# EAGLE board ram-2mb (EAGLE 9.5.2), part 1 of 2
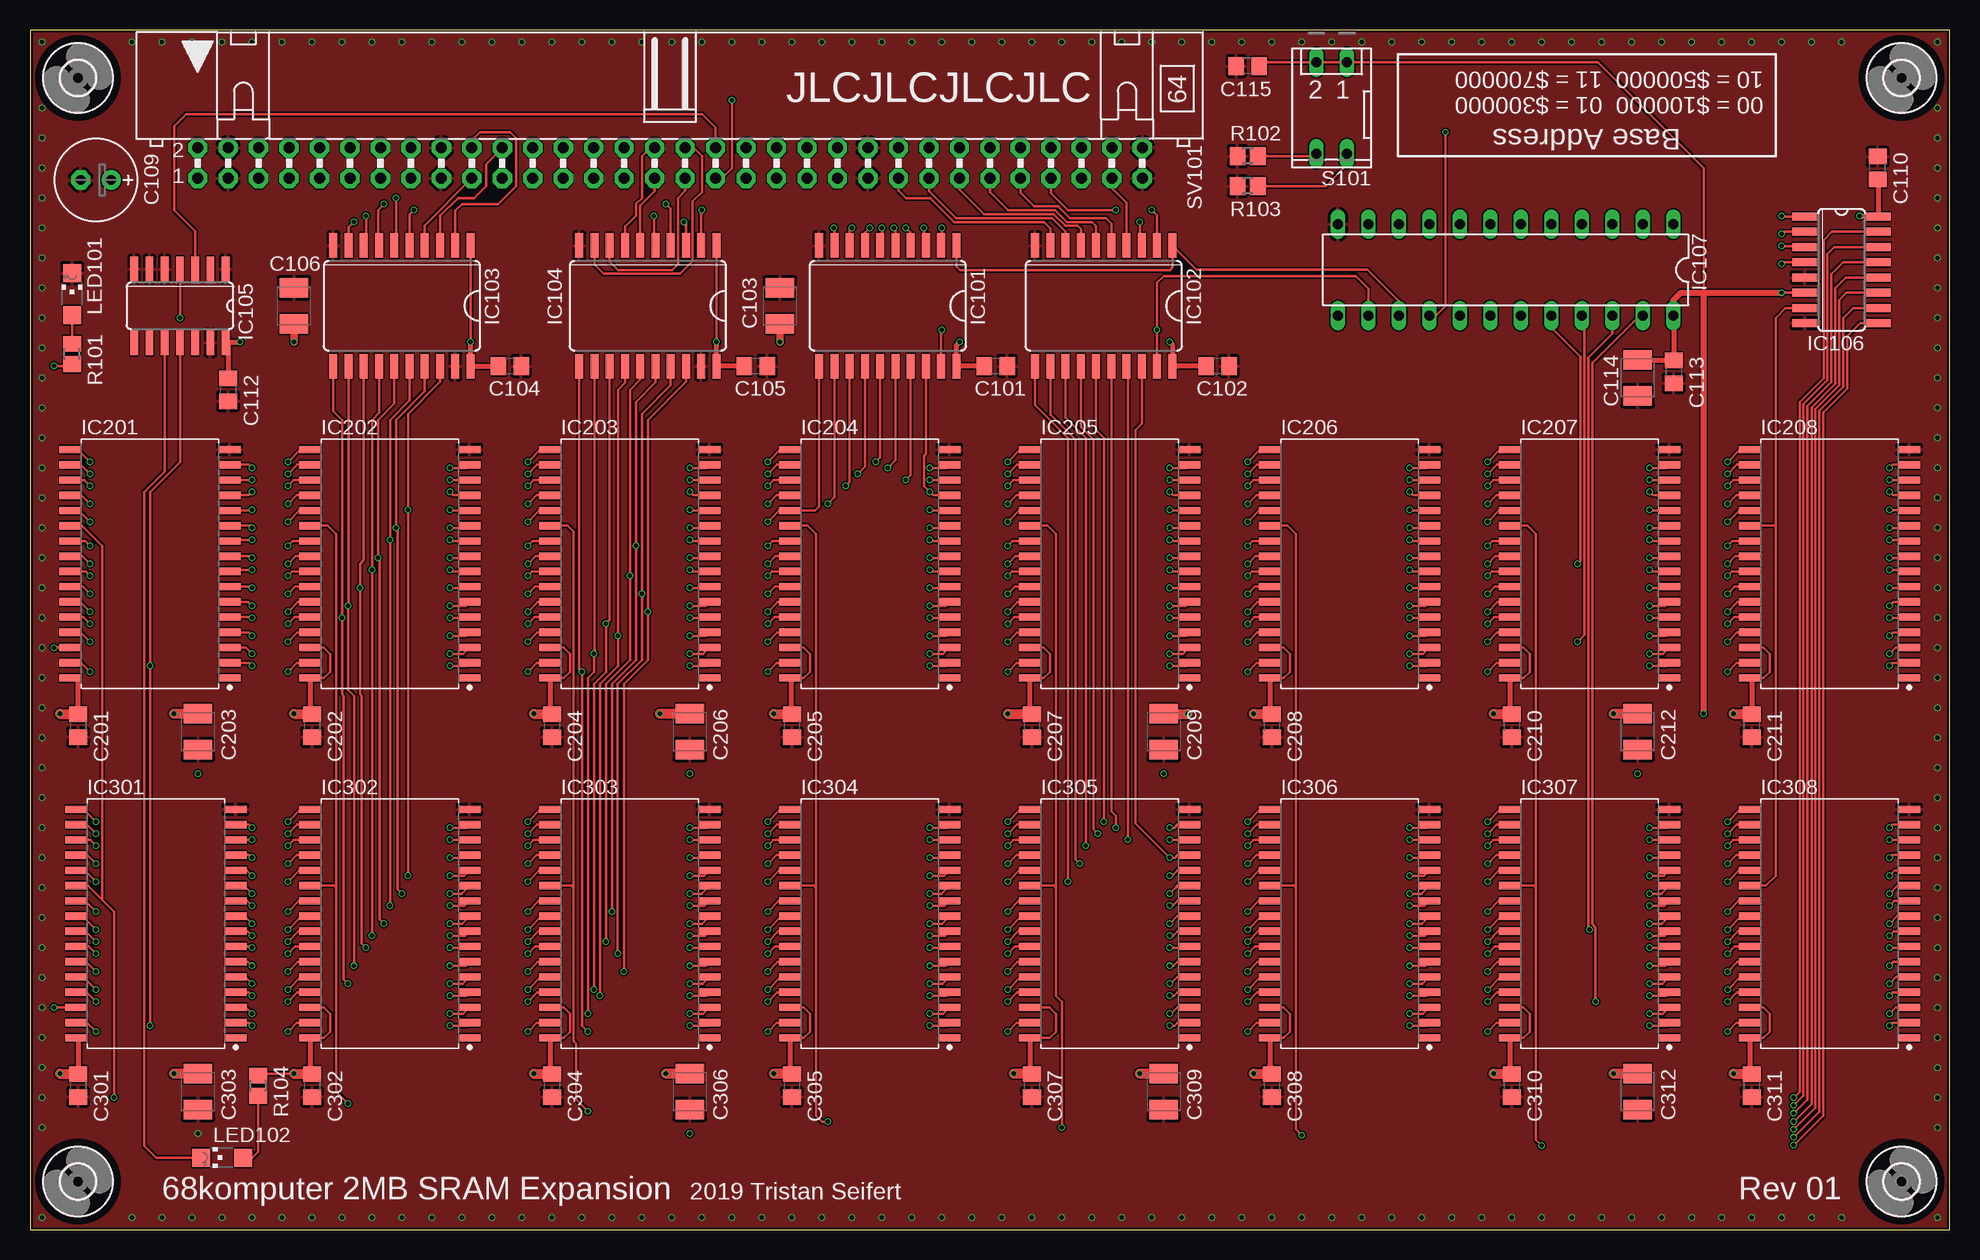
[diagram p0: board, top side]
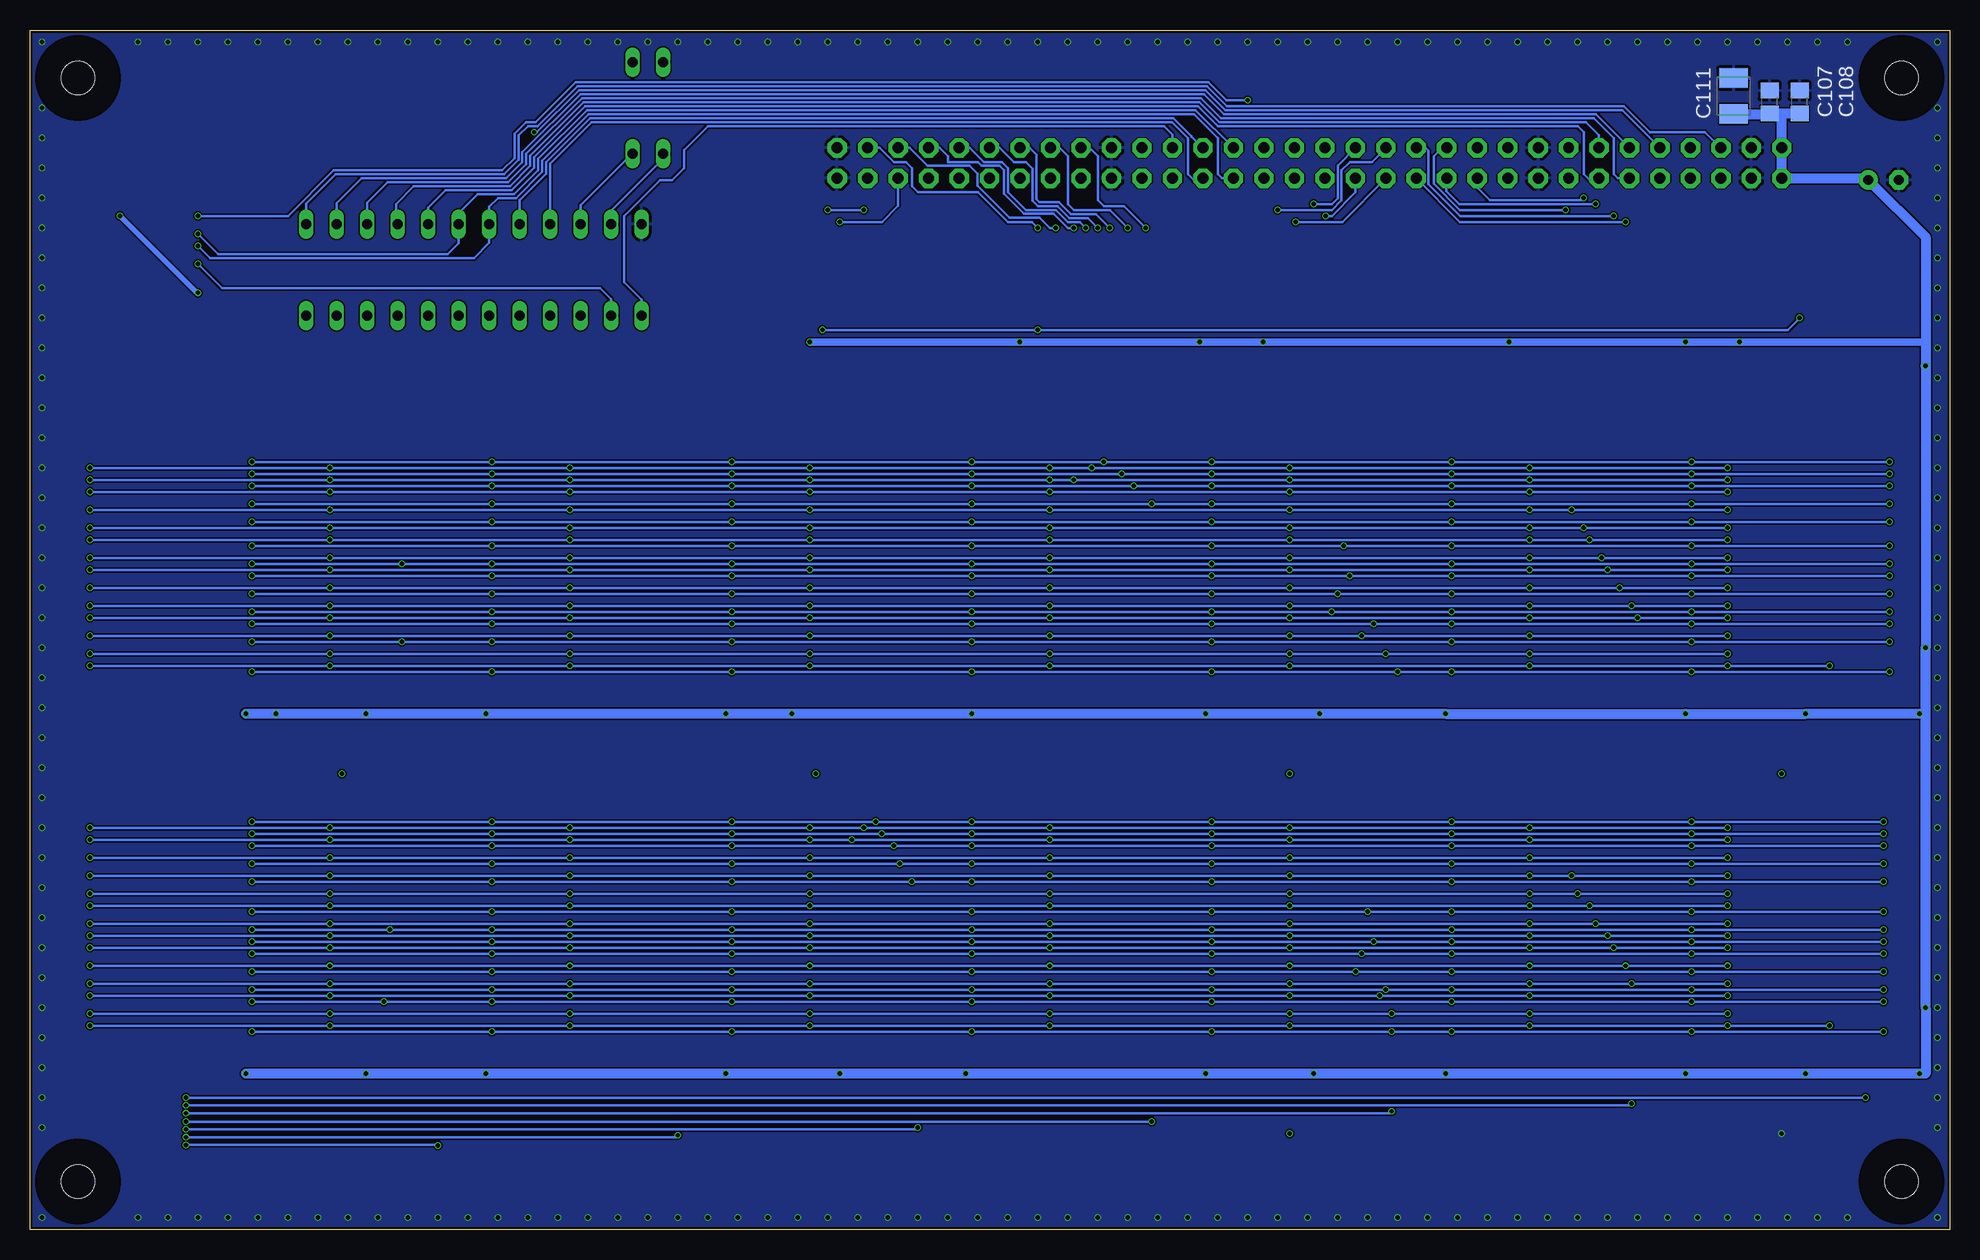
[diagram p1: board, bottom side, seen from below]

Size 160 x 100 mm. Coordinates in mm from the lower left corner, seen from the top.
Outline: 0,0 160,0 160,100 0,100 0,0
Copper layers (1*16): Top 0.035559375mm / dielectric 1.6mm / Bottom 0.035559375mm
Design rules "jlcpcb2layer": minimum track width 5mil, minimum drill 12mil, track to track 5mil, track to pad 5mil, pad to pad 5mil, via to via 5mil, smd to smd 5mil, copper to edge 8mil, drill to drill 6mil, minimum pad ring 5mil, minimum via ring 3mil, stop-mask expansion 2.5mil, vias tented up to drill 0mil, thermal gap 10mil
Net classes: 0 default: width 0.203 mm

## Footprints (pad centres in the part's own frame; a part is rotated, then mirrored left to right if it is on the bottom)
C0805 = smd 1.3 x 1.5: 1 -0.95,0; 2 0.95,0
SMC_B = smd 1.6 x 2.4: + -1.5,0; - 1.5,0
E2,5-7 = drill 0.813 pad 1.6: + -1.27,0 | drill 0.813 pad 1.6 octagon: - 1.27,0
2,8 = hole 2.8: 0,0
SO20W = smd 0.66 x 2.032: 1 -5.715,-5.029; 2 -4.445,-5.029; 3 -3.175,-5.029; 4 -1.905,-5.029; 5 -0.635,-5.029; 6 0.635,-5.029; 7 1.905,-5.029; 8 3.175,-5.029; 9 4.445,-5.029; 10 5.715,-5.029; 11 5.715,5.029; 12 4.445,5.029; 13 3.175,5.029; 14 1.905,5.029; 15 0.635,5.029; 16 -0.635,5.029; 17 -1.905,5.029; 18 -3.175,5.029; 19 -4.445,5.029; 20 -5.715,5.029
SO14 = smd 0.66 x 2.032: 1 -3.81,-3.073; 2 -2.54,-3.073; 3 -1.27,-3.073; 4 0,-3.073; 5 1.27,-3.073; 6 2.54,-3.073; 7 3.81,-3.073; 8 3.81,3.073; 9 2.54,3.073; 10 1.27,3.073; 11 0,3.073; 12 -1.27,3.073; 13 -2.54,3.073; 14 -3.81,3.073
SO16 = smd 0.66 x 2.032: 1 -4.445,-3.073; 2 -3.175,-3.073; 3 -1.905,-3.073; 4 -0.635,-3.073; 5 0.635,-3.073; 6 1.905,-3.073; 7 3.175,-3.073; 8 4.445,-3.073; 9 4.445,3.073; 10 3.175,3.073; 11 1.905,3.073; 12 0.635,3.073; 13 -0.635,3.073; 14 -1.905,3.073; 15 -3.175,3.073; 16 -4.445,3.073
DIL24S = drill 0.813 long: 1 -13.97,-3.81; 2 -11.43,-3.81; 3 -8.89,-3.81; 4 -6.35,-3.81; 5 -3.81,-3.81; 6 -1.27,-3.81; 7 1.27,-3.81; 8 3.81,-3.81; 9 6.35,-3.81; 10 8.89,-3.81; 11 11.43,-3.81; 12 13.97,-3.81; 13 13.97,3.81; 14 11.43,3.81; 15 8.89,3.81; 16 6.35,3.81; 17 3.81,3.81; 18 1.27,3.81; 19 -1.27,3.81; 20 -3.81,3.81; 21 -6.35,3.81; 22 -8.89,3.81; 23 -11.43,3.81; 24 -13.97,3.81
SOIC127P1412X299-32N = smd 1.816 x 0.605: 1 -6.636,9.525; 2 -6.636,8.255; 3 -6.636,6.985; 4 -6.636,5.715; 5 -6.636,4.445; 6 -6.636,3.175; 7 -6.636,1.905; 8 -6.636,0.635; 9 -6.636,-0.635; 10 -6.636,-1.905; 11 -6.636,-3.175; 12 -6.636,-4.445; 13 -6.636,-5.715; 14 -6.636,-6.985; 15 -6.636,-8.255; 16 -6.636,-9.525; 17 6.636,-9.525; 18 6.636,-8.255; 19 6.636,-6.985; 20 6.636,-5.715; 21 6.636,-4.445; 22 6.636,-3.175; 23 6.636,-1.905; 24 6.636,-0.635; 25 6.636,0.635; 26 6.636,1.905; 27 6.636,3.175; 28 6.636,4.445; 29 6.636,5.715; 30 6.636,6.985; 31 6.636,8.255; 32 6.636,9.525
CHIPLED_1206 = smd 1.5 x 1.5: A 0,-1.75; C 0,1.75
R2012 = smd 1.3 x 1.5: 1 -0.85,0; 2 0.85,0
DP-02 = drill 0.813 long: 1 -1.27,-3.81; 2 1.27,-3.81; 3 1.27,3.81; 4 -1.27,3.81
ML64L = drill 0.914 pad 1.6 octagon: 1 -39.37,-1.27; 2 -39.37,1.27; 3 -36.83,-1.27; 4 -36.83,1.27; 5 -34.29,-1.27; 6 -34.29,1.27; 7 -31.75,-1.27; 8 -31.75,1.27; 9 -29.21,-1.27; 10 -29.21,1.27; 11 -26.67,-1.27; 12 -26.67,1.27; 13 -24.13,-1.27; 14 -24.13,1.27; 15 -21.59,-1.27; 16 -21.59,1.27; 17 -19.05,-1.27; 18 -19.05,1.27; 19 -16.51,-1.27; 20 -16.51,1.27; 21 -13.97,-1.27; 22 -13.97,1.27; 23 -11.43,-1.27; 24 -11.43,1.27; 25 -8.89,-1.27; 26 -8.89,1.27; 27 -6.35,-1.27; 28 -6.35,1.27; 29 -3.81,-1.27; 30 -3.81,1.27; 31 -1.27,-1.27; 32 -1.27,1.27; 33 1.27,-1.27; 34 1.27,1.27; 35 3.81,-1.27; 36 3.81,1.27; 37 6.35,-1.27; 38 6.35,1.27; 39 8.89,-1.27; 40 8.89,1.27; 41 11.43,-1.27; 42 11.43,1.27; 43 13.97,-1.27; 44 13.97,1.27; 45 16.51,-1.27; 46 16.51,1.27; 47 19.05,-1.27; 48 19.05,1.27; 49 21.59,-1.27; 50 21.59,1.27; 51 24.13,-1.27; 52 24.13,1.27; 53 26.67,-1.27; 54 26.67,1.27; 55 29.21,-1.27; 56 29.21,1.27; 57 31.75,-1.27; 58 31.75,1.27; 59 34.29,-1.27; 60 34.29,1.27; 61 36.83,-1.27; 62 36.83,1.27; 63 39.37,-1.27; 64 39.37,1.27

## Placement (x,y rotation side)
C101  100nF  [C0805]  80.5,72 0 top
C102  100nF  [C0805]  99,72 0 top
C103  10µF  [SMC_B]  62.5,77 90 top
C104  100nF  [C0805]  40,72 0 top
C105  100nF  [C0805]  60.5,72 0 top
C106  10µF  [SMC_B]  22,77 90 top
C107  100nF  [C0805]  15,94 90 bottom
C108  1µF  [C0805]  12.5,94 90 bottom
C109  120µF  [E2,5-7]  5.5,87.5 180 top
C110  100nF  [C0805]  154,88.5 90 top
C111  10µF  [SMC_B]  18,94.5 90 bottom
C112  100nF  [C0805]  16.5,70 270 top
C113  100nF  [C0805]  137,71.5 270 top
C114  10µF  [SMC_B]  134,71 270 top
C115  100nF  [C0805]  101.5,97 180 top
C201  100nF  [C0805]  4,42 270 top
C202  100nF  [C0805]  23.5,42 270 top
C203  10µF  [SMC_B]  14,41.5 270 top
C204  100nF  [C0805]  43.5,42 270 top
C205  100nF  [C0805]  63.5,42 270 top
C206  10µF  [SMC_B]  55,41.5 270 top
C207  100nF  [C0805]  83.5,42 270 top
C208  100nF  [C0805]  103.5,42 270 top
C209  10µF  [SMC_B]  94.5,41.5 270 top
C210  100nF  [C0805]  123.5,42 270 top
C211  100nF  [C0805]  143.5,42 270 top
C212  10µF  [SMC_B]  134,41.5 270 top
C301  100nF  [C0805]  4,12 270 top
C302  100nF  [C0805]  23.5,12 270 top
C303  10µF  [SMC_B]  14,11.5 270 top
C304  100nF  [C0805]  43.5,12 270 top
C305  100nF  [C0805]  63.5,12 270 top
C306  10µF  [SMC_B]  55,11.5 270 top
C307  100nF  [C0805]  83.5,12 270 top
C308  100nF  [C0805]  103.5,12 270 top
C309  10µF  [SMC_B]  94.5,11.5 270 top
C310  100nF  [C0805]  123.5,12 270 top
C311  100nF  [C0805]  143.5,12 270 top
C312  10µF  [SMC_B]  134,11.5 270 top
H101  MOUNT-HOLE2.8  [2,8]  4,96 0 top
H102  MOUNT-HOLE2.8  [2,8]  4,4 0 top
H103  MOUNT-HOLE2.8  [2,8]  156,96 0 top
H104  MOUNT-HOLE2.8  [2,8]  156,4 0 top
IC101  74HC245DW  [SO20W]  71.5,77 180 top
IC102  74HC245DW  [SO20W]  89.5,77 180 top
IC103  74HC245DW  [SO20W]  31,77 180 top
IC104  74HC245DW  [SO20W]  51.5,77 180 top
IC105  74HC243D  [SO14]  12.5,77 180 top
IC106  74HC138D  [SO16]  151,80 270 top
IC107  GAL22V10D  [DIL24S]  123,80 180 top
IC201  [SOIC127P1412X299-32N]  10,55.5 180 top
IC202  [SOIC127P1412X299-32N]  30,55.5 180 top
IC203  [SOIC127P1412X299-32N]  50,55.5 180 top
IC204  [SOIC127P1412X299-32N]  70,55.5 180 top
IC205  [SOIC127P1412X299-32N]  90,55.5 180 top
IC206  [SOIC127P1412X299-32N]  110,55.5 180 top
IC207  [SOIC127P1412X299-32N]  130,55.5 180 top
IC208  [SOIC127P1412X299-32N]  150,55.5 180 top
IC301  [SOIC127P1412X299-32N]  10.5,25.5 180 top
IC302  [SOIC127P1412X299-32N]  30,25.5 180 top
IC303  [SOIC127P1412X299-32N]  50,25.5 180 top
IC304  [SOIC127P1412X299-32N]  70,25.5 180 top
IC305  [SOIC127P1412X299-32N]  90,25.5 180 top
IC306  [SOIC127P1412X299-32N]  110,25.5 180 top
IC307  [SOIC127P1412X299-32N]  130,25.5 180 top
IC308  [SOIC127P1412X299-32N]  150,25.5 180 top
LED101  [CHIPLED_1206]  3.5,78 0 top
LED102  [CHIPLED_1206]  16,6 90 top
R101  3k  [R2012]  3.5,73 90 top
R102  10k  [R2012]  101.5,89.5 180 top
R103  10k  [R2012]  101.5,87 180 top
R104  3k  [R2012]  19,12 270 top
S101  [DP-02]  108.5,93.5 180 top
SV101  [ML64L]  53.34,88.9 0 top

## Library data of the parts
C101 C102 C104 C105 C107 C110 C112 C113 C115 C201 C202 C204 C205 C207 C208 C210 C211 C301 C302 C304 C305 C307 C308 C310 C311 = rcl; MOUSER: 710-885012207072; SPICEPREFIX: C
C103 C106 C111 C114 C203 C206 C209 C212 C303 C306 C309 C312 = rcl; MOUSER: 581-TAJB106K020RNJV; SPICEPREFIX: C
C108 = rcl; MOUSER: 710-885012207078; SPICEPREFIX: C
C109 = rcl; MOUSER: 710-860020373007; SPICEPREFIX: C
H101-H104 = holes
IC101-IC104 = 74xx-eu; MOUSER: 595-SN74HC245DWR
IC105 = 74xx-eu; MOUSER: 595-CD74HC243M96
IC106 = 74xx-eu; MOUSER: 595-SN74HC138DG4
IC107 = 68komputer; MOUSER_SOCKET: 575-1104732441001000
IC201-IC208 IC301-IC308 = 68komputer
LED101 = led; MOUSER: 710-156120YS75300
LED102 = led; MOUSER: 710-156120VS75300
R101 R104 = rcl; MOUSER: 652-CR0805JW-302ELF; SPICEPREFIX: R
R102 R103 = rcl; MOUSER: 652-CR0805FX-1002ELF; SPICEPREFIX: R
S101 = switch-dil; MPN: MCDP02; OC_FARNELL: 1255233; OC_NEWARK: 26M1095
SV101 = con-harting-ml; OC_FARNELL: unknown; OC_NEWARK: unknown

## Nets
!AS: IC107.5 SV101.13
!BG: SV101.9
!BGACK: SV101.8
!BR: SV101.7
!CS: IC101.19 IC102.19 IC105.4 IC106.4 IC107.14
!CS_LED: IC105.10 LED102.C
!DTACK: IC107.16 SV101.10
!EXT_ID: SV101.41
!EXTI_A: SV101.16
!EXTI_B: SV101.15
!HALT: SV101.5
!LDS: IC107.3 SV101.11
!LOE: IC107.20 IC201.24 IC202.24 IC203.24 IC204.24 IC205.24 IC206.24 IC207.24 IC208.24
!LWE: IC107.21 IC201.29 IC202.29 IC203.29 IC204.29 IC205.29 IC206.29 IC207.29 IC208.29
!RAM_CS0: IC106.15 IC201.22 IC301.22
!RAM_CS1: IC106.14 IC202.22 IC302.22
!RAM_CS2: IC106.13 IC203.22 IC303.22
!RAM_CS3: IC106.12 IC204.22 IC304.22
!RAM_CS4: IC106.11 IC205.22 IC305.22
!RAM_CS5: IC106.10 IC206.22 IC306.22
!RAM_CS6: IC106.9 IC207.22 IC307.22
!RAM_CS7: IC106.7 IC208.22 IC308.22
!RD: IC101.1 IC102.1 IC107.15
!RESET: IC107.1 SV101.6
!UDS: IC107.4 SV101.14
!UOE: IC107.22 IC301.24 IC302.24 IC303.24 IC304.24 IC305.24 IC306.24 IC307.24 IC308.24
!UWE: IC107.23 IC301.29 IC302.29 IC303.29 IC304.29 IC305.29 IC306.29 IC307.29 IC308.29
+5V: C101.1 C102.1 C103.+ C104.1 C105.1 C106.+ C107.1 C108.1 C109.+ C110.1 C111.+ C112.1 C113.1 C114.+ C115.1 C201.1 C202.1 C203.+ C204.1 C205.1 C206.+ C207.1 C208.1 C209.+ C210.1 C211.1 C212.+ C301.1 C302.1 C303.+ C304.1 C305.1 C306.+ C307.1 C308.1 C309.+ C310.1 C311.1 C312.+ IC101.20 IC102.20 IC103.1 IC103.20 IC104.1 IC104.20 IC105.14 IC106.6 IC106.16 IC107.24 IC201.30 IC201.32 IC202.30 IC202.32 IC203.30 IC203.32 IC204.30 IC204.32 IC205.30 IC205.32 IC206.30 IC206.32 IC207.30 IC207.32 IC208.30 IC208.32 IC301.30 IC301.32 IC302.30 IC302.32 IC303.30 IC303.32 IC304.30 IC304.32 IC305.30 IC305.32 IC306.30 IC306.32 IC307.30 IC307.32 IC308.30 IC308.32 R101.1 R104.1 S101.1 S101.2 SV101.1 SV101.2
A1: IC103.2 SV101.20
A2: IC103.3 SV101.22
A3: IC103.4 SV101.19
A4: IC103.5 SV101.24
A5: IC103.6 SV101.21
A6: IC103.7 SV101.23
A7: IC103.8 SV101.26
A8: IC103.9 SV101.25
A9: IC104.2 SV101.28
A10: IC104.3 SV101.27
A11: IC104.4 SV101.30
A12: IC104.5 SV101.29
A13: IC104.6 SV101.31
A14: IC104.7 SV101.32
A15: IC104.8 SV101.33
A16: IC104.9 SV101.34
A17: IC105.3 SV101.36
A18: IC106.1 SV101.35
A19: IC106.2 IC107.6 SV101.38
A20: IC106.3 IC107.7 SV101.37
A21: IC107.8 SV101.40
A22: IC107.9 SV101.39
A23: IC107.13 SV101.42
ADDR_SET0: IC107.10 R103.1 S101.4
ADDR_SET1: IC107.11 R102.1 S101.3
D0: IC101.2 SV101.62
D1: IC101.3 SV101.60
D2: IC101.4 SV101.58
D3: IC101.5 SV101.56
D4: IC101.6 SV101.54
D5: IC101.7 SV101.52
D6: IC101.8 SV101.50
D7: IC101.9 SV101.48
D8: IC102.2 SV101.57
D9: IC102.3 SV101.59
D10: IC102.4 SV101.61
D11: IC102.5 SV101.55
D12: IC102.6 SV101.53
D13: IC102.7 SV101.51
D14: IC102.8 SV101.49
D15: IC102.9 SV101.47
GND: C101.2 C102.2 C103.- C104.2 C105.2 C106.- C107.2 C108.2 C109.- C110.2 C111.- C112.2 C113.2 C114.- C115.2 C201.2 C202.2 C203.- C204.2 C205.2 C206.- C207.2 C208.2 C209.- C210.2 C211.2 C212.- C301.2 C302.2 C303.- C304.2 C305.2 C306.- C307.2 C308.2 C309.- C310.2 C311.2 C312.- IC101.10 IC102.10 IC103.10 IC103.19 IC104.10 IC104.19 IC105.1 IC105.5 IC105.6 IC105.7 IC105.13 IC106.5 IC106.8 IC107.12 IC201.16 IC202.16 IC203.16 IC204.16 IC205.16 IC206.16 IC207.16 IC208.16 IC301.16 IC302.16 IC303.16 IC304.16 IC305.16 IC306.16 IC307.16 IC308.16 LED101.C R102.2 R103.2 SV101.3 SV101.4 SV101.17 SV101.18 SV101.45 SV101.46 SV101.63 SV101.64
N$1: LED102.A R104.2
N$18: LED101.A R101.2
R/!W!: IC107.2 SV101.12
RAM_A0: IC103.18 IC201.12 IC202.12 IC203.12 IC204.12 IC205.12 IC206.12 IC207.12 IC208.12 IC301.12 IC302.12 IC303.12 IC304.12 IC305.12 IC306.12 IC307.12 IC308.12
RAM_A1: IC103.17 IC201.11 IC202.11 IC203.11 IC204.11 IC205.11 IC206.11 IC207.11 IC208.11 IC301.11 IC302.11 IC303.11 IC304.11 IC305.11 IC306.11 IC307.11 IC308.11
RAM_A2: IC103.16 IC201.10 IC202.10 IC203.10 IC204.10 IC205.10 IC206.10 IC207.10 IC208.10 IC301.10 IC302.10 IC303.10 IC304.10 IC305.10 IC306.10 IC307.10 IC308.10
RAM_A3: IC103.15 IC201.9 IC202.9 IC203.9 IC204.9 IC205.9 IC206.9 IC207.9 IC208.9 IC301.9 IC302.9 IC303.9 IC304.9 IC305.9 IC306.9 IC307.9 IC308.9
RAM_A4: IC103.14 IC201.8 IC202.8 IC203.8 IC204.8 IC205.8 IC206.8 IC207.8 IC208.8 IC301.8 IC302.8 IC303.8 IC304.8 IC305.8 IC306.8 IC307.8 IC308.8
RAM_A5: IC103.13 IC201.7 IC202.7 IC203.7 IC204.7 IC205.7 IC206.7 IC207.7 IC208.7 IC301.7 IC302.7 IC303.7 IC304.7 IC305.7 IC306.7 IC307.7 IC308.7
RAM_A6: IC103.12 IC201.6 IC202.6 IC203.6 IC204.6 IC205.6 IC206.6 IC207.6 IC208.6 IC301.6 IC302.6 IC303.6 IC304.6 IC305.6 IC306.6 IC307.6 IC308.6
RAM_A7: IC103.11 IC201.5 IC202.5 IC203.5 IC204.5 IC205.5 IC206.5 IC207.5 IC208.5 IC301.5 IC302.5 IC303.5 IC304.5 IC305.5 IC306.5 IC307.5 IC308.5
RAM_A8: IC104.18 IC201.27 IC202.27 IC203.27 IC204.27 IC205.27 IC206.27 IC207.27 IC208.27 IC301.27 IC302.27 IC303.27 IC304.27 IC305.27 IC306.27 IC307.27 IC308.27
RAM_A9: IC104.17 IC201.26 IC202.26 IC203.26 IC204.26 IC205.26 IC206.26 IC207.26 IC208.26 IC301.26 IC302.26 IC303.26 IC304.26 IC305.26 IC306.26 IC307.26 IC308.26
RAM_A10: IC104.16 IC201.23 IC202.23 IC203.23 IC204.23 IC205.23 IC206.23 IC207.23 IC208.23 IC301.23 IC302.23 IC303.23 IC304.23 IC305.23 IC306.23 IC307.23 IC308.23
RAM_A11: IC104.15 IC201.25 IC202.25 IC203.25 IC204.25 IC205.25 IC206.25 IC207.25 IC208.25 IC301.25 IC302.25 IC303.25 IC304.25 IC305.25 IC306.25 IC307.25 IC308.25
RAM_A12: IC104.14 IC201.4 IC202.4 IC203.4 IC204.4 IC205.4 IC206.4 IC207.4 IC208.4 IC301.4 IC302.4 IC303.4 IC304.4 IC305.4 IC306.4 IC307.4 IC308.4
RAM_A13: IC104.13 IC201.28 IC202.28 IC203.28 IC204.28 IC205.28 IC206.28 IC207.28 IC208.28 IC301.28 IC302.28 IC303.28 IC304.28 IC305.28 IC306.28 IC307.28 IC308.28
RAM_A14: IC104.12 IC201.3 IC202.3 IC203.3 IC204.3 IC205.3 IC206.3 IC207.3 IC208.3 IC301.3 IC302.3 IC303.3 IC304.3 IC305.3 IC306.3 IC307.3 IC308.3
RAM_A15: IC104.11 IC201.31 IC202.31 IC203.31 IC204.31 IC205.31 IC206.31 IC207.31 IC208.31 IC301.31 IC302.31 IC303.31 IC304.31 IC305.31 IC306.31 IC307.31 IC308.31
RAM_A16: IC105.11 IC201.2 IC202.2 IC203.2 IC204.2 IC205.2 IC206.2 IC207.2 IC208.2 IC301.2 IC302.2 IC303.2 IC304.2 IC305.2 IC306.2 IC307.2 IC308.2
RAM_D0: IC101.18 IC201.13 IC202.13 IC203.13 IC204.13 IC205.13 IC206.13 IC207.13 IC208.13
RAM_D1: IC101.17 IC201.14 IC202.14 IC203.14 IC204.14 IC205.14 IC206.14 IC207.14 IC208.14
RAM_D2: IC101.16 IC201.15 IC202.15 IC203.15 IC204.15 IC205.15 IC206.15 IC207.15 IC208.15
RAM_D3: IC101.15 IC201.17 IC202.17 IC203.17 IC204.17 IC205.17 IC206.17 IC207.17 IC208.17
RAM_D4: IC101.14 IC201.18 IC202.18 IC203.18 IC204.18 IC205.18 IC206.18 IC207.18 IC208.18
RAM_D5: IC101.13 IC201.19 IC202.19 IC203.19 IC204.19 IC205.19 IC206.19 IC207.19 IC208.19
RAM_D6: IC101.12 IC201.20 IC202.20 IC203.20 IC204.20 IC205.20 IC206.20 IC207.20 IC208.20
RAM_D7: IC101.11 IC201.21 IC202.21 IC203.21 IC204.21 IC205.21 IC206.21 IC207.21 IC208.21
RAM_D8: IC102.18 IC301.13 IC302.13 IC303.13 IC304.13 IC305.13 IC306.13 IC307.13 IC308.13
RAM_D9: IC102.17 IC301.14 IC302.14 IC303.14 IC304.14 IC305.14 IC306.14 IC307.14 IC308.14
RAM_D10: IC102.16 IC301.15 IC302.15 IC303.15 IC304.15 IC305.15 IC306.15 IC307.15 IC308.15
RAM_D11: IC102.15 IC301.17 IC302.17 IC303.17 IC304.17 IC305.17 IC306.17 IC307.17 IC308.17
RAM_D12: IC102.14 IC301.18 IC302.18 IC303.18 IC304.18 IC305.18 IC306.18 IC307.18 IC308.18
RAM_D13: IC102.13 IC301.19 IC302.19 IC303.19 IC304.19 IC305.19 IC306.19 IC307.19 IC308.19
RAM_D14: IC102.12 IC301.20 IC302.20 IC303.20 IC304.20 IC305.20 IC306.20 IC307.20 IC308.20
RAM_D15: IC102.11 IC301.21 IC302.21 IC303.21 IC304.21 IC305.21 IC306.21 IC307.21 IC308.21